# EAGLE board moteus_n1 (EAGLE 9.6.0), part 1 of 2
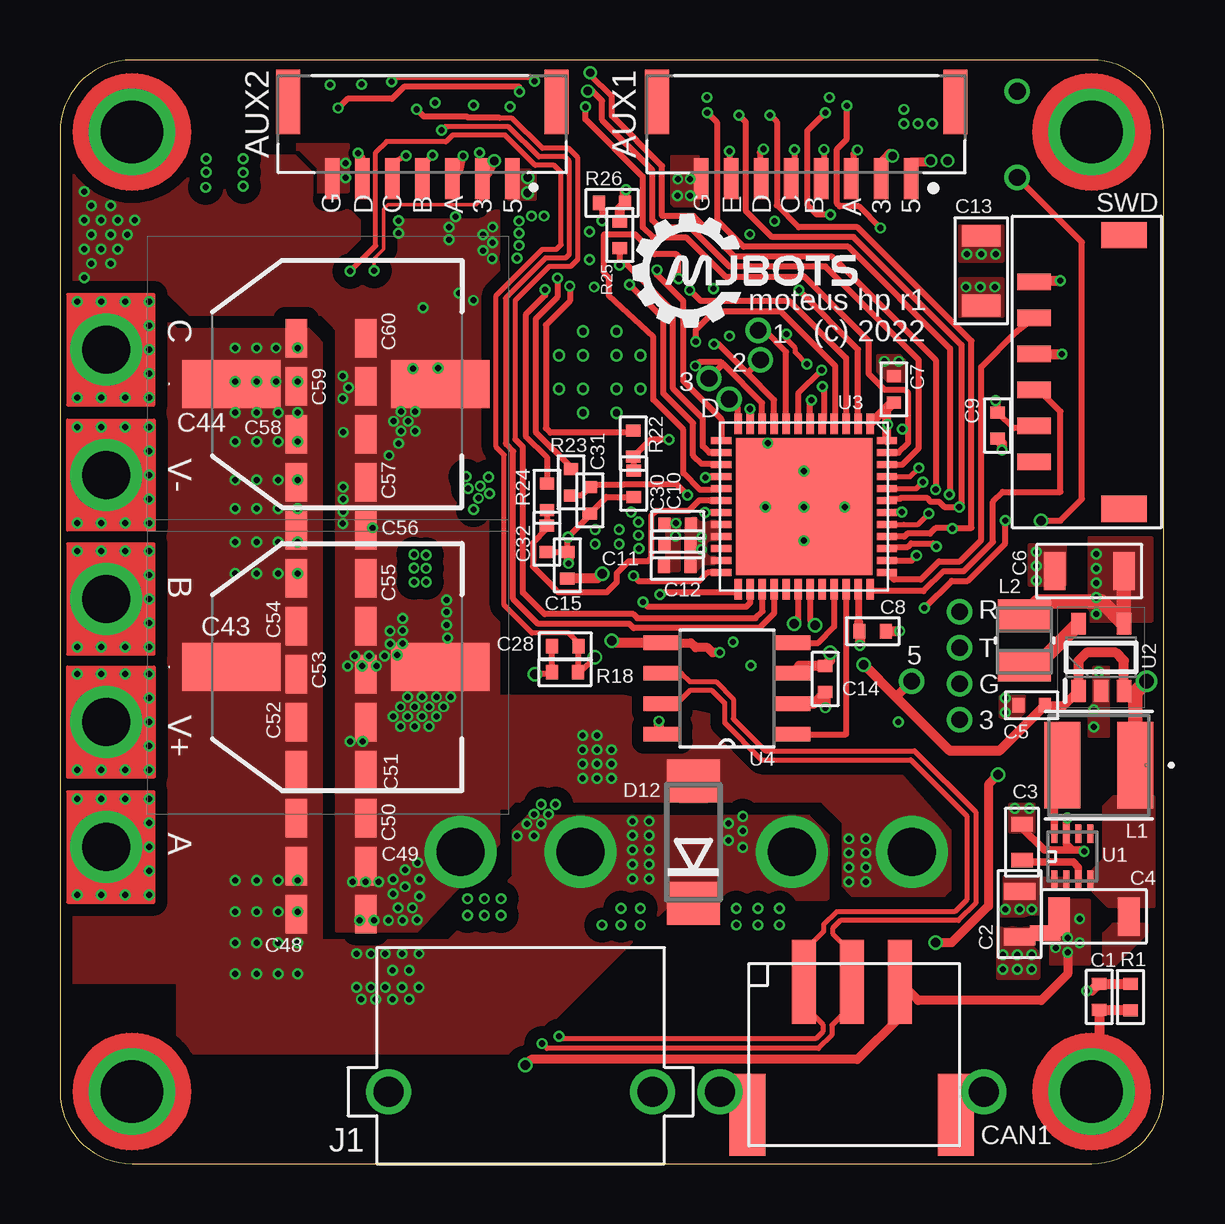
[diagram p0: board, top side]
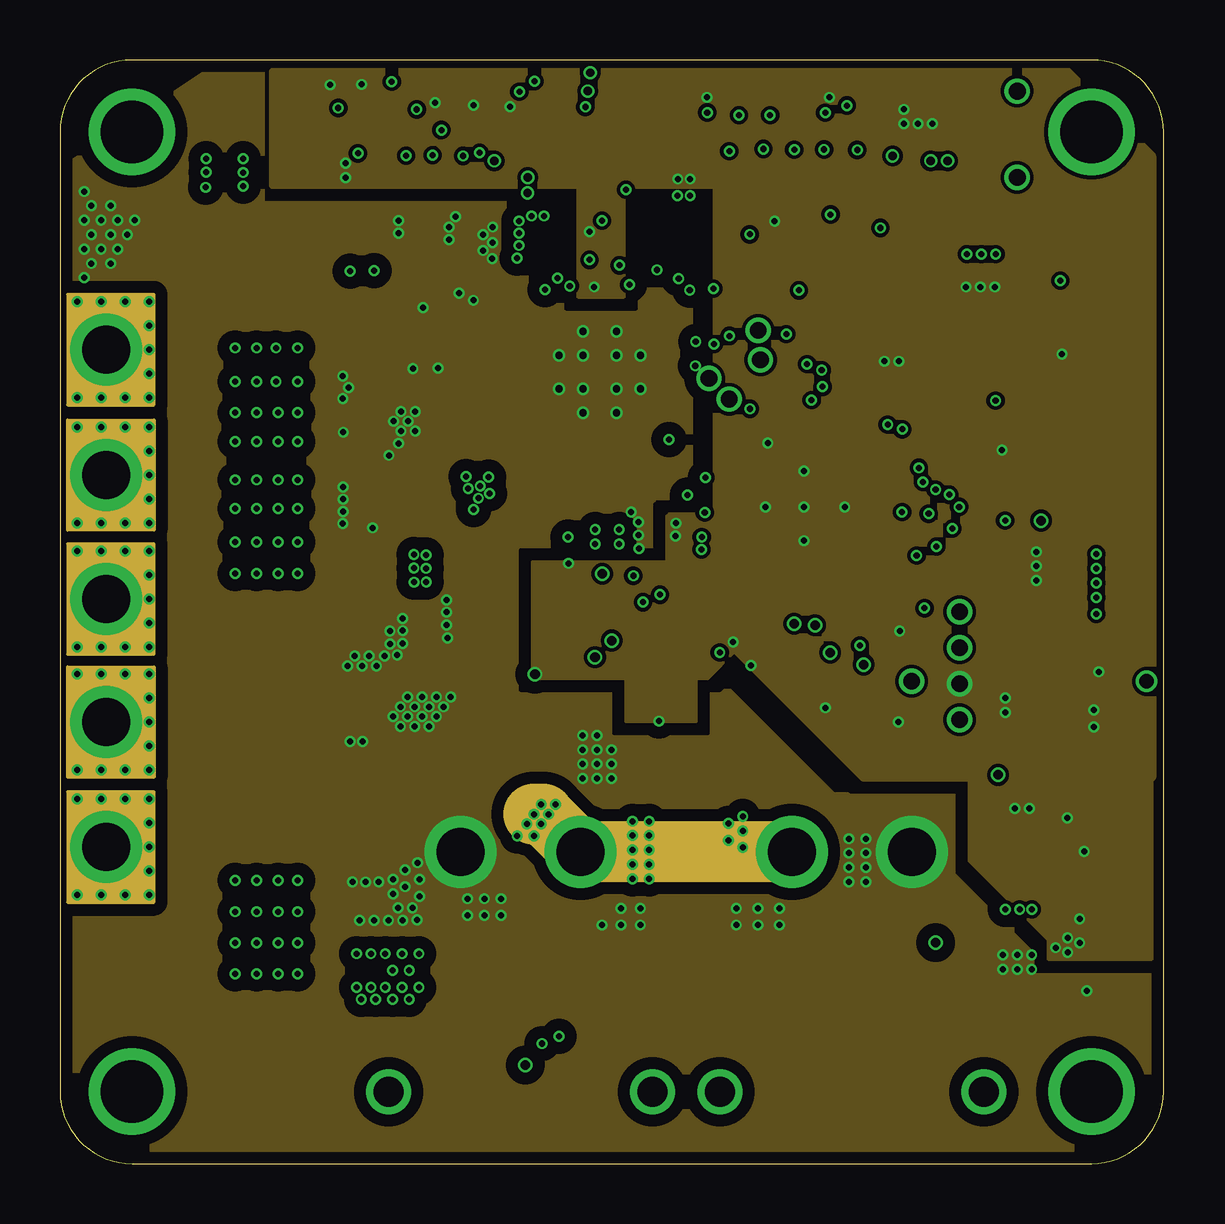
[diagram p1: board, inner layer Route2]
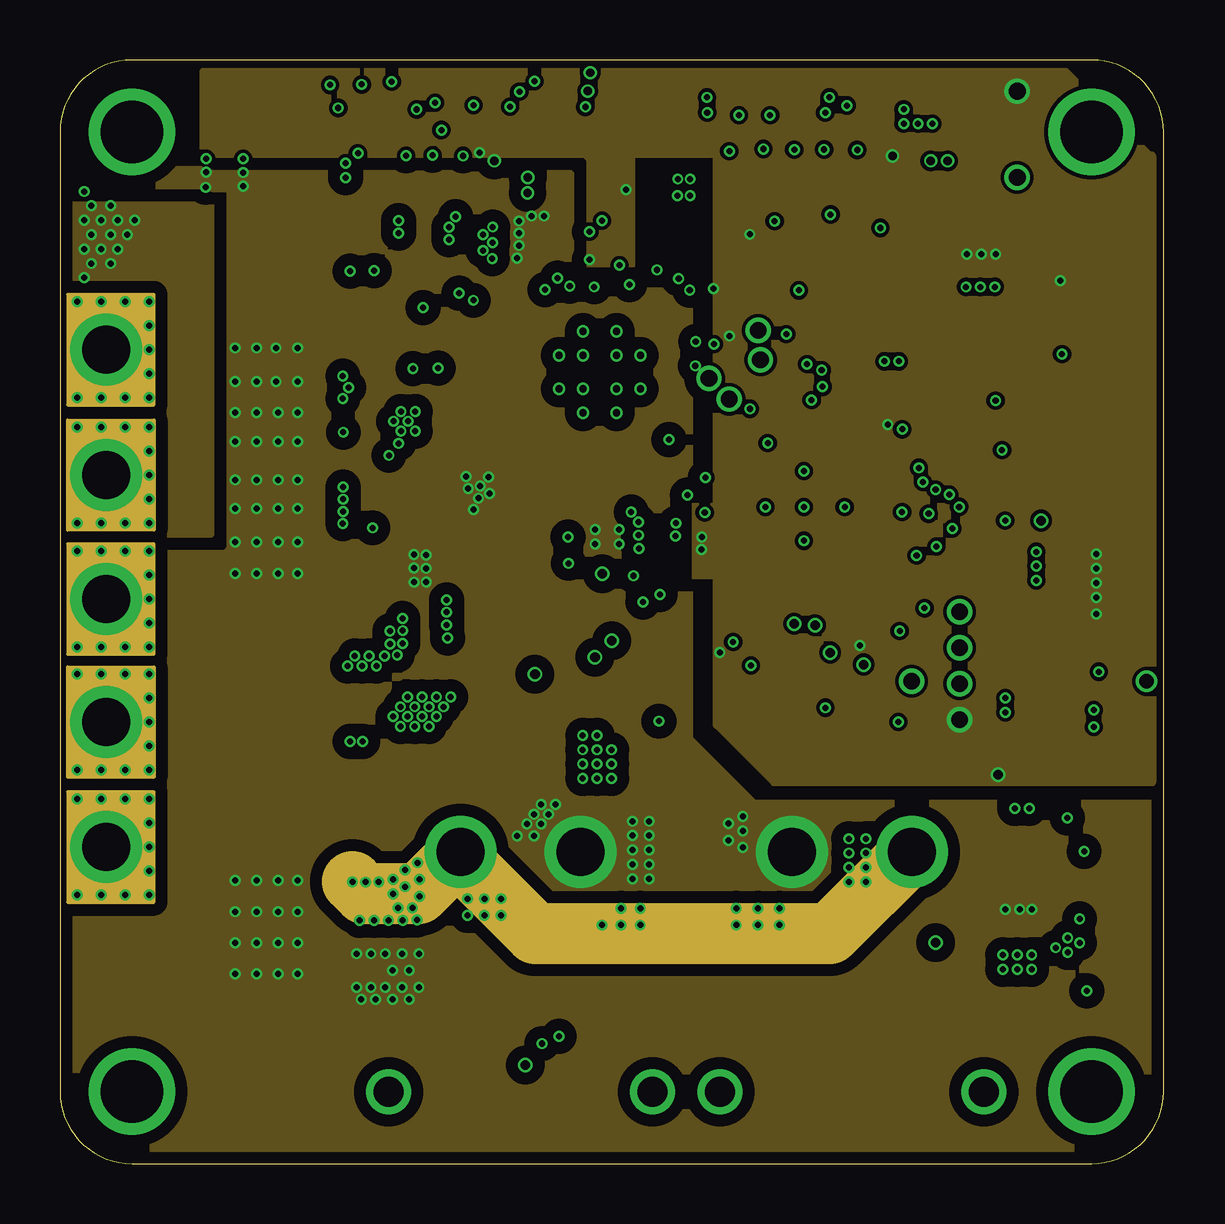
[diagram p2: board, inner layer Route15]
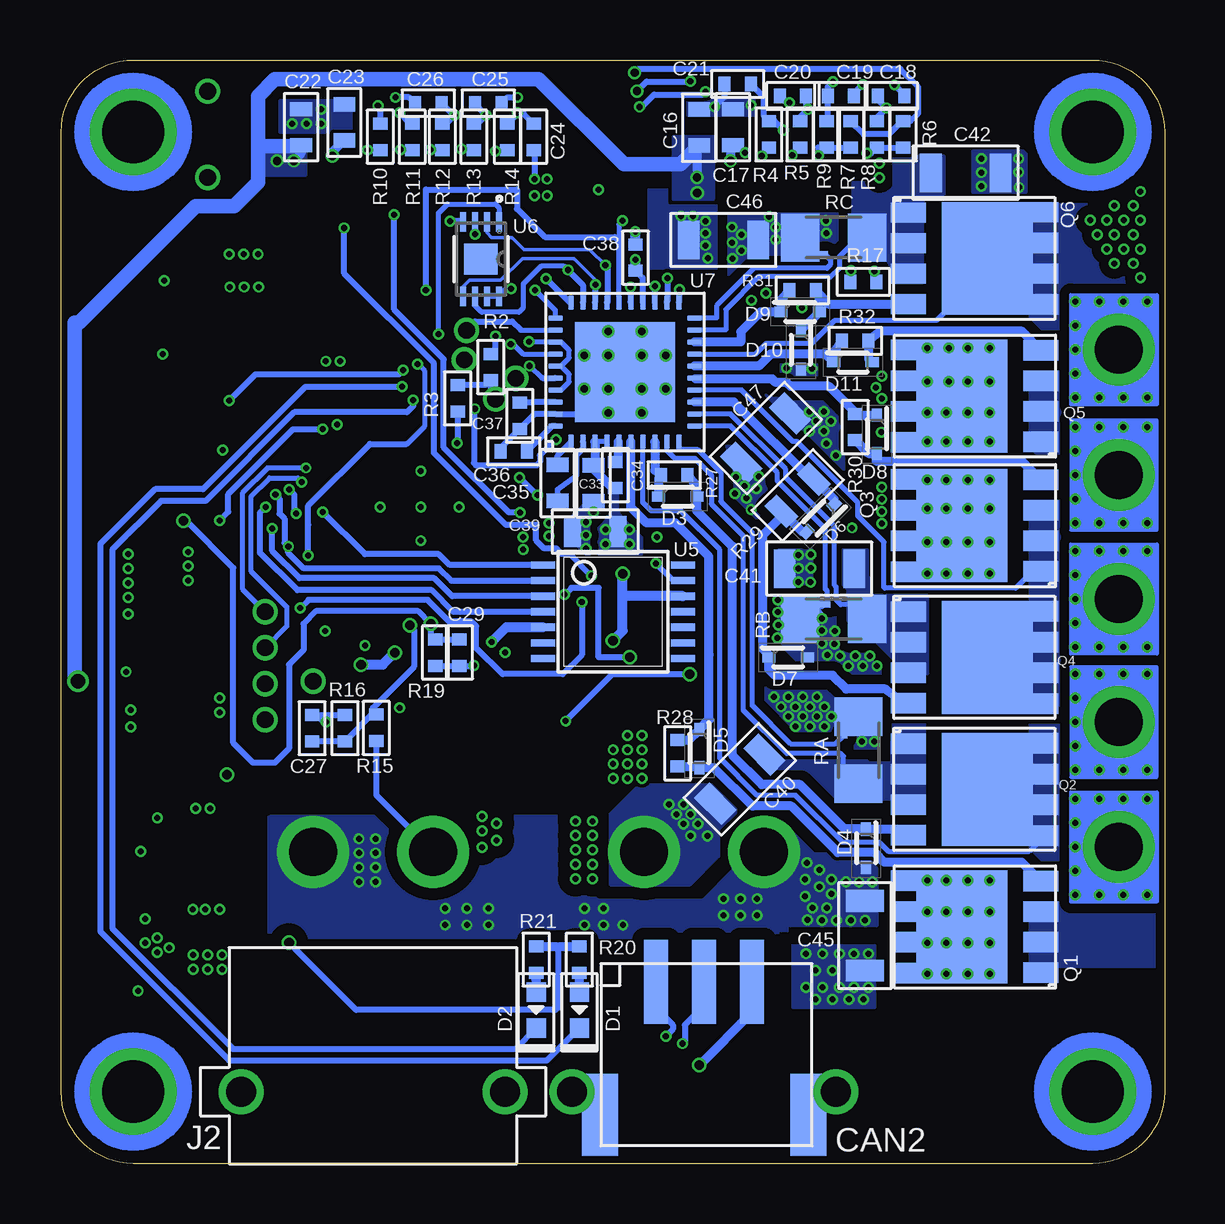
[diagram p3: board, bottom side, seen from below]

Size 46 x 46 mm. Coordinates in mm from the lower left corner, seen from the top.
Outline: 0,43 0,3 arc90 3,0 43,0 arc90 46,3 46,43 arc90 43,46 3,46 arc90 0,43
Copper layers (1*2*15*16): Top 0.035mm / dielectric 0.23mm / Route2 0.035mm / dielectric 0.93mm / Route15 0.035mm / dielectric 0.23mm / Bottom 0.035mm
Design rules "MF_4_mil_drill_4_Layer *": minimum track width 5mil, minimum drill 4mil, track to track 6mil, track to pad 6mil, pad to pad 6mil, via to via 6mil, smd to smd 0mil, copper to edge 10mil, drill to drill 10mil, minimum pad ring 4mil, minimum via ring 4mil, stop-mask expansion 2mil, vias tented up to drill 25mil, thermal gap 10mil
Net classes: 0 default: width 0.127 mm; 1 CAN: width 0.216 mm, clearance 0.127 mm; 2 HV: clearance 0.13 mm; 3 GATE: width 0.384 mm

## Footprints (pad centres in the part's own frame; a part is rotated, then mirrored left to right if it is on the bottom)
16AWG_TERM = drill 2: 1 0,0 | drill 0.254: 2 -2,1.8; 3 -2,0.8; 4 -2,-0.2; 5 -2,-1.2; 6 -1,1.8; 7 2,1.8; 8 1,1.8; 9 2,0.8; 10 2,-0.2; 11 2,-1.2; 12 0,1.8
JST_SM08B-GHS-TB(LF)(SN) = smd 0.6 x 1.7: 1 -4.375,0; 2 -3.125,0; 3 -1.875,0; 4 -0.625,0; 5 0.625,0; 6 1.875,0; 7 3.125,0; 8 4.375,0 | smd 1 x 2.7: SH1 -6.225,-3.2; SH2 6.225,-3.2
JST_SM07B-GHS-TB(LF)(SN) = smd 0.6 x 1.7: 1 -3.75,1.85; 2 -2.5,1.85; 3 -1.25,1.85; 4 0,1.85; 5 1.25,1.85; 6 2.5,1.85; 7 3.75,1.85 | smd 1 x 2.7: S1 5.6,-1.35; S2 -5.6,-1.35
C0402 = smd 0.5 x 0.6: P$1 -0.55,0; P$2 0.55,0
C0805 = smd 0.7 x 1.3: P$1 -0.95,0; P$2 0.95,0
C0603 = smd 0.6 x 0.9: P$1 -0.75,0; P$2 0.75,0
C1206 = smd 0.9 x 1.6: P$1 -1.45,0; P$2 1.45,0
EEHZS1V471UP = smd 4.1 x 2: 1 -4.35,0; 2 4.35,0
C1206_NOCREAM_NOBORDER = smd 0.9 x 1.6: P$1 -1.45,0; P$2 1.45,0
JST_S3B-PH-SM4-TB(LF)(SN) = smd 1 x 3.5: 1 2,-2.98; 2 0,-2.98; 3 -2,-2.98 | smd 1.5 x 3.4: S1 -4.35,2.57; S2 4.35,2.57
LED0603 = smd 0.8 x 0.8: ANODE 0.75,0; CATHODE -0.75,0
SODFL1608X70N = smd 0.55 x 0.42: 1 -0.8,0; 2 0.8,0
DO214AA = smd 1.8 x 2.2: A 2.55,0; C -2.55,0
24AWG_PAD = drill 0.7: P$1 0,0
XT30PW_MALE = drill 2: 1 -2.5,0; 2 2.5,0 | drill 1.25: M1 -5.5,10; M2 5.5,10
IND_BOURNS_SRN4018 = smd 1.499 x 3.607: 1 -1.524,0; 2 1.524,0
IND_4024100_WRE = smd 1.295 x 2.21: 1 -1.054,0; 2 1.054,0
M2.5MOUNT = drill 2.6: P$1 0,0
SOP_ADVANCE_8_VIAS = smd 0.85 x 1.45: 1 -1.905,-2.95; 2 -0.635,-2.95; 3 0.635,-2.95; 4 1.905,-2.95 | smd 0.85 x 1.1: 5 1.925,2.75; 6 0.637,2.75; 7 -0.637,2.75; 8 -1.925,2.75 | smd 4.7 x 3.8: PAD 0,0.35
SOP_ADVANCE_8 = smd 0.85 x 1.45: 1 -1.905,-2.95; 2 -0.635,-2.95; 3 0.635,-2.95; 4 1.905,-2.95 | smd 0.85 x 1.1: 5 1.925,2.75; 6 0.637,2.75; 7 -0.637,2.75; 8 -1.925,2.75 | smd 4.7 x 3.8: PAD 0,0.35
R0402 = smd 0.5 x 0.6: P$1 -0.55,0; P$2 0.55,0
R0805 = smd 0.7 x 1.3: P$1 -0.95,0; P$2 0.95,0
M1206 = smd 1.6 x 2: 1 -1.4,0; 2 1.4,0
SHORT_TOP-50 = smd 0.254 x 0.254: 1 0.127,0; 2 -0.127,0
SHORT_TOP-MEDIUM = smd 0.635 x 0.635: 1 0.318,0; 2 -0.318,0
JST_S6B-ZR-SM4A-TF(LF)(SN) = smd 0.7 x 1.4: 1 3.75,0; 2 2.25,0; 3 0.75,0; 4 -0.75,0; 5 -2.25,0; 6 -3.75,0 | smd 1.1 x 1.9: P1 5.7,3.75; P2 -5.7,3.75
21-0487A_MXM = smd 0.762 x 0.254: 1 -0.953,0.75; 2 -0.953,0.25; 3 -0.953,-0.25; 4 -0.953,-0.75; 5 0.953,-0.75; 6 0.953,-0.25; 7 0.953,0.25; 8 0.953,0.75
SOT95P280X130-5N = smd 0.9 x 0.6: 1 -1.4,0.95; 2 -1.4,0; 3 -1.4,-0.95; 4 1.4,-0.95; 5 1.4,0.95
QFN50P700X700X60-49N = smd 0.85 x 0.3: 1 -3.45,2.75; 2 -3.45,2.25; 3 -3.45,1.75; 4 -3.45,1.25; 5 -3.45,0.75; 6 -3.45,0.25; 7 -3.45,-0.25; 8 -3.45,-0.75; 9 -3.45,-1.25; 10 -3.45,-1.75; 11 -3.45,-2.25; 12 -3.45,-2.75; 25 3.45,-2.75; 26 3.45,-2.25; 27 3.45,-1.75; 28 3.45,-1.25; 29 3.45,-0.75; 30 3.45,-0.25; 31 3.45,0.25; 32 3.45,0.75; 33 3.45,1.25; 34 3.45,1.75; 35 3.45,2.25; 36 3.45,2.75 | smd 0.3 x 0.85: 13 -2.75,-3.45; 14 -2.25,-3.45; 15 -1.75,-3.45; 16 -1.25,-3.45; 17 -0.75,-3.45; 18 -0.25,-3.45; 19 0.25,-3.45; 20 0.75,-3.45; 21 1.25,-3.45; 22 1.75,-3.45; 23 2.25,-3.45; 24 2.75,-3.45; 37 2.75,3.45; 38 2.25,3.45; 39 1.75,3.45; 40 1.25,3.45; 41 0.75,3.45; 42 0.25,3.45; 43 -0.25,3.45; 44 -0.75,3.45; 45 -1.25,3.45; 46 -1.75,3.45; 47 -2.25,3.45; 48 -2.75,3.45 | smd 5.7 x 5.7: 49 0,0
SOIC8 = smd 1.549 x 0.61: 1 -2.7,1.905; 2 -2.7,0.635; 3 -2.7,-0.635; 4 -2.7,-1.905; 5 2.7,-1.905; 6 2.7,-0.635; 7 2.7,0.635; 8 2.7,1.905
TSSOP14 = smd 0.305 x 0.991: 1 -1.95,-2.918; 2 -1.3,-2.918; 3 -0.65,-2.918; 4 0,-2.918; 5 0.65,-2.918; 6 1.3,-2.918; 7 1.95,-2.918; 8 1.95,2.918; 9 1.3,2.918; 10 0.65,2.918; 11 0,2.918; 12 -0.65,2.918; 13 -1.3,2.918; 14 -1.95,2.918
UDFN8_2X3_ONS-M = smd 0.813 x 0.254: 1 -1.549,0.75; 2 -1.549,0.25; 3 -1.549,-0.25; 4 -1.549,-0.75; 5 1.549,-0.75; 6 1.549,-0.25; 7 1.549,0.25; 8 1.549,0.75 | smd 1.295 x 1.397: 9 0,0
WQFN-40 = smd 0.22 x 0.6: 1 2.25,2.9; 2 1.75,2.9; 3 1.25,2.9; 4 0.75,2.9; 5 0.25,2.9; 6 -0.25,2.9; 7 -0.75,2.9; 8 -1.25,2.9; 9 -1.75,2.9; 10 -2.25,2.9; 21 -2.25,-2.9; 22 -1.75,-2.9; 23 -1.25,-2.9; 24 -0.75,-2.9; 25 -0.25,-2.9; 26 0.25,-2.9; 27 0.75,-2.9; 28 1.25,-2.9; 29 1.75,-2.9; 30 2.25,-2.9 | smd 0.6 x 0.22: 11 -2.9,2.25; 12 -2.9,1.75; 13 -2.9,1.25; 14 -2.9,0.75; 15 -2.9,0.25; 16 -2.9,-0.25; 17 -2.9,-0.75; 18 -2.9,-1.25; 19 -2.9,-1.75; 20 -2.9,-2.25; 31 2.9,-2.25; 32 2.9,-1.75; 33 2.9,-1.25; 34 2.9,-0.75; 35 2.9,-0.25; 36 2.9,0.25; 37 2.9,0.75; 38 2.9,1.25; 39 2.9,1.75; 40 2.9,2.25 | drill 0.305: P1 -0.7,-1.7; P2 0.7,-1.7; P3 1.7,-0.7; P7 0.7,-0.7; P8 0.7,1.7; P9 -0.7,1.7; P12 -0.7,-0.7; P13 0.7,0.7; P14 -0.7,0.7; P17 -1.7,-0.7; P18 1.7,0.7; P19 -1.7,0.7 | smd 4.15 x 4.15: PAD 0,0

## Placement (x,y rotation side)
A  PAD16AWG_TERM  [16AWG_TERM]  1.92,13.19 90 bottom
AUX1  SM08B-GHS-TB(LF)(SN)  [JST_SM08B-GHS-TB(LF)(SN)]  31.1,41.05 180 top
AUX2  SM07B-GHS-TB(LF)(SN)  [JST_SM07B-GHS-TB(LF)(SN)]  15.1,42.9 180 top
B  PAD16AWG_TERM  [16AWG_TERM]  1.92,23.53 90 bottom
C  PAD16AWG_TERM  [16AWG_TERM]  1.92,33.92 90 bottom
C1  DNP  [C0402]  43.32,6.95 90 top
C2  1uF 100V  [C0805]  40,10.4 270 top
C3  1uF  [C0603]  40.1,13.4 90 top
C4  10uF  [C1206]  43.1,10.3 180 top
C5  1uF  [C0402]  40.5,19.1 180 top
C6  22uF  [C1206]  42.9,24.7 180 top
C7  0.1uF  [C0402]  34.76,32.27 90 top
C8  0.1uF  [C0402]  33.88,22.19 0 top
C9  0.1uF  [C0402]  39.08,30.76 270 top
C10  1uF  [C0402]  25.75,26.62 180 top
C11  0.1uF  [C0402]  25.74,25.82 180 top
C12  0.1uF  [C0402]  25.73,24.92 180 top
C13  10uF  [C1206]  38.4,37.21 90 top
C14  0.1uF  [C0402]  31.9,20.2 270 top
C15  0.1uF  [C0402]  21.15,24.94 90 top
C16  1uF  [C0603]  19.41,43.18 90 bottom
C17  1uF  [C0603]  18,43.2 90 bottom
C18  DNP  [C0402]  11.4,44.5 0 bottom
C19  DNP  [C0402]  13.5,44.5 0 bottom
C20  DNP  [C0402]  15.5,44.5 180 bottom
C21  DNP  [C0402]  17.8,45 180 bottom
C22  1uF  [C0603]  36,43.2 90 bottom
C23  1uF  [C0603]  34.2,43.4 90 bottom
C24  DNP  [C0402]  26.3,42.8 270 bottom
C25  DNP  [C0402]  28.2,44.2 0 bottom
C26  DNP  [C0402]  30.7,44.2 180 bottom
C27  0.01uF  [C0402]  35.54,18.15 90 bottom
C28  0.1uF  [C0402]  21.06,21.56 180 top
C29  0.1uF  [C0402]  29.4,21.3 270 bottom
C30  1000pF  [C0402]  23.91,28.34 270 top
C31  1000pF  [C0402]  22.09,27.65 270 top
C32  1000pF  [C0402]  20.29,26.04 270 top
C33  0.1uF 100V  [C0603]  23.81,28.35 270 bottom
C34  1uF  [C0402]  22.9,28.7 90 bottom
C35  0.1uF 100V  [C0603]  25.31,28.37 90 bottom
C36  1uF  [C0402]  27.13,29.69 0 bottom
C37  1uF  [C0402]  26.89,31.17 90 bottom
C38  0.1uF  [C0402]  22.06,37.76 270 bottom
C39  0.47uF 100V  [C0805]  23.74,26.34 180 bottom
C40  0.1uF 100V  [C1206]  17.71,16.02 45 bottom
C41  0.1uF 100V  [C1206]  14.4,24.8 0 bottom
C42  0.1uF 100V  [C1206]  8.3,41.3 180 bottom
C43  100uF 63V  [EEHZS1V471UP]  11.5,20.7 0 top
C44  100uF 63V  [EEHZS1V471UP]  11.5,32.5 0 top
C45  4.7uF 100V  [C1206]  12.5,9.5 90 bottom
C46  4.7uF 100V  [C1206]  18.4,38.5 0 bottom
C47  4.7uF 100V  [C1206]  16.63,30.24 45 bottom
C48  4.7uF 100V  [C1206_NOCREAM_NOBORDER]  11.3,10.4 0 top
C49  4.7uF 100V  [C1206_NOCREAM_NOBORDER]  11.3,12.4 0 top
C50  4.7uF 100V  [C1206_NOCREAM_NOBORDER]  11.3,14.4 0 top
C51  4.7uF 100V  [C1206_NOCREAM_NOBORDER]  11.3,16.4 0 top
C52  4.7uF 100V  [C1206_NOCREAM_NOBORDER]  11.3,18.4 0 top
C53  4.7uF 100V  [C1206_NOCREAM_NOBORDER]  11.3,20.4 0 top
C54  4.7uF 100V  [C1206_NOCREAM_NOBORDER]  11.3,22.4 0 top
C55  4.7uF 100V  [C1206_NOCREAM_NOBORDER]  11.3,24.4 0 top
C56  4.7uF 100V  [C1206_NOCREAM_NOBORDER]  11.3,26.4 0 top
C57  4.7uF 100V  [C1206_NOCREAM_NOBORDER]  11.3,28.4 0 top
C58  4.7uF 100V  [C1206_NOCREAM_NOBORDER]  11.3,30.4 0 top
C59  4.7uF 100V  [C1206_NOCREAM_NOBORDER]  11.3,32.4 0 top
C60  4.7uF 100V  [C1206_NOCREAM_NOBORDER]  11.3,34.4 0 top
CAN1  JST-PH3  [JST_S3B-PH-SM4-TB(LF)(SN)]  33,4.6 180 top
CAN2  JST-PH3  [JST_S3B-PH-SM4-TB(LF)(SN)]  19.2,4.6 180 bottom
D1  MF-LED-0603-RED  [LED0603]  24.4,6.4 90 bottom
D2  MF-LED-0603-RED  [LED0603]  26.2,6.4 90 bottom
D3  BAT41KFILM  [SODFL1608X70N]  20.3,27.8 0 bottom
D4  BAT41KFILM  [SODFL1608X70N]  12.45,13.14 270 bottom
D5  BAT41KFILM  [SODFL1608X70N]  19.4,17.3 270 bottom
D6  BAT41KFILM  [SODFL1608X70N]  14.35,26.9 225 bottom
D7  BAT41KFILM  [SODFL1608X70N]  15.7,21.1 0 bottom
D8  BAT41KFILM  [SODFL1608X70N]  12,30.4 270 bottom
D9  BAT41KFILM  [SODFL1608X70N]  15.2,35.5 0 bottom
D10  BAT41KFILM  [SODFL1608X70N]  15.17,33.92 270 bottom
D11  BAT41KFILM  [SODFL1608X70N]  13,33.4 0 bottom
D12  [DO214AA]  26.4,13.4 90 top
D33  PAD24AWG_PAD  [24AWG_PAD]  37.5,18.5 0 top
D50  PAD24AWG_PAD  [24AWG_PAD]  35.5,20.1 0 top
DAC  PAD24AWG_PAD  [24AWG_PAD]  27.9,31.86 0 top
DG1  PAD24AWG_PAD  [24AWG_PAD]  37.5,20 0 top
DTR  PAD24AWG_PAD  [24AWG_PAD]  37.5,23 0 top
DTX  PAD24AWG_PAD  [24AWG_PAD]  37.5,21.5 0 top
J1  XT30XT30PW_MALE  [XT30PW_MALE]  19.2,13 180 top
J2  XT30XT30PW_MALE  [XT30PW_MALE]  33,13 180 bottom
L1  SRN4018-220M  [IND_BOURNS_SRN4018]  43.3,16.6 180 top
L2  74404024100  [IND_4024100_WRE]  40.2,21.8 270 top
M1  MOUNT  [M2.5MOUNT]  3,3 0 top
M2  MOUNT  [M2.5MOUNT]  3,43 0 top
M3  MOUNT  [M2.5MOUNT]  43,3 0 top
M4  MOUNT  [M2.5MOUNT]  43,43 0 top
MOT1  PAD24AWG_PAD  [24AWG_PAD]  29.1,34.73 0 top
MOT2  PAD24AWG_PAD  [24AWG_PAD]  29.2,33.5 0 top
MOT3  PAD24AWG_PAD  [24AWG_PAD]  27.05,32.73 0 top
Q1  TPH1R204PL_VIAS  [SOP_ADVANCE_8_VIAS]  8.11,9.86 90 bottom
Q2  TPH1R204PLSOP_ADVANCE_8  [SOP_ADVANCE_8]  7.74,15.6 270 bottom
Q3  TPH1R204PL_VIAS  [SOP_ADVANCE_8_VIAS]  8.11,26.59 90 bottom
Q4  TPH1R204PLSOP_ADVANCE_8  [SOP_ADVANCE_8]  7.74,21.1 270 bottom
Q5  TPH1R204PL_VIAS  [SOP_ADVANCE_8_VIAS]  8.11,31.99 90 bottom
Q6  TPH1R204PLSOP_ADVANCE_8  [SOP_ADVANCE_8]  7.74,37.73 270 bottom
R1  DNP  [R0402]  44.62,6.94 90 top
R2  DNP  [R0402]  28.1,33.2 90 bottom
R3  100k 1%  [R0402]  29.47,31.9 90 bottom
R4  100  [R0402]  16.5,42.9 90 bottom
R5  100  [R0402]  15.2,42.9 90 bottom
R6  2k  [R0402]  10.9,42.9 270 bottom
R7  2k  [R0402]  13.1,42.9 270 bottom
R8  100  [R0402]  12,42.9 90 bottom
R9  100  [R0402]  14.1,42.9 90 bottom
R10  100  [R0402]  32.7,42.8 90 bottom
R11  100  [R0402]  31.37,42.8 90 bottom
R12  100  [R0402]  30.11,42.8 90 bottom
R13  100  [R0402]  28.8,42.8 90 bottom
R14  100  [R0402]  27.4,42.8 90 bottom
R15  100k 1%  [R0402]  32.87,18.16 270 bottom
R16  4.7k 1%  [R0402]  34.17,18.15 270 bottom
R17  47k NTC  [R0402]  12.56,36.75 0 bottom
R18  10k 1%  [R0402]  21.05,20.48 180 top
R19  10k 1%  [R0402]  30.4,21.3 270 bottom
R20  560  [R0402]  24.4,8.5 270 bottom
R21  560  [R0402]  26.2,8.5 270 bottom
R22  22  [R0402]  23.9,30.01 270 top
R23  22  [R0402]  21.3,28.4 270 top
R24  22  [R0402]  20.3,27.79 270 top
R25  2k  [R0402]  23.34,38.71 270 top
R26  2k  [R0402]  23.01,40.04 180 top
R27  7.5  [R0402]  20.45,28.7 0 bottom
R28  7.5  [R0402]  20.3,17.1 270 bottom
R29  7.5  [R0805]  15.3,27.86 225 bottom
R30  7.5  [R0402]  12.9,30.7 270 bottom
R31  7.5  [R0402]  15.1,36.4 0 bottom
R32  7.5  [R0402]  12.9,34.3 0 bottom
RA  0.5mOhm 1% 2W  [M1206]  12.76,17.23 270 bottom
RB  0.5mOhm 1% 2W  [M1206]  13.8,22.7 0 bottom
RC  0.5mOhm 1% 2W  [M1206]  13.8,38.6 0 bottom
SH1  SHORTT5  [SHORT_TOP-50]  13.36,17.98 270 bottom
SH2  SHORTT5  [SHORT_TOP-50]  14.2,23.3 0 bottom
SH3  SHORTT5  [SHORT_TOP-50]  14.3,37.9 0 bottom
SH4  SHORTMEDIUM  [SHORT_TOP-MEDIUM]  41.06,9.6 180 top
SWD  JST-ZH6  [JST_S6B-ZR-SM4A-TF(LF)(SN)]  40.6,33 270 top
TEMP1  PAD24AWG_PAD  [24AWG_PAD]  39.9,44.7 0 top
TEMP2  PAD24AWG_PAD  [24AWG_PAD]  39.9,41.1 0 top
U1  MAX15062AATA+T  [21-0487A_MXM]  42.2,12.8 90 top
U2  XC9265A331MR-G  [SOT95P280X130-5N]  43.4,21.1 90 top
U3  STM32G474CEU6  [QFN50P700X700X60-49N]  31.02,27.38 270 top
U4  TCAN1042HGV  [SOIC8]  27.8,19.8 180 top
U5  AS5147  [TSSOP14]  23,23 270 bottom
U6  CAT25080HU4I-GT3UDFN8_2X3_ONS-M  [UDFN8_2X3_ONS-M]  28.5,37.7 270 bottom
U7  DRV8353S  [WQFN-40]  22.5,32.99 180 bottom
VN  PAD16AWG_TERM  [16AWG_TERM]  1.92,28.7 270 top
VP  PAD16AWG_TERM  [16AWG_TERM]  1.92,18.4 270 top

## Library data of the parts
A B C VN VP = moteus_hp; POPULATE: 0
AUX1 = SM08B-GHS-TB_LF__SN_; DESCRIPTION: Connector Header Surface Mount, Right Angle 8 position 0.049 (1.25mm); DIGI-KEY_PART_NUMBER: 455-1570-2-ND; MF: JST Sales; MP: SM08B-GHS-TB(LF)(SN); MPN: SM08B-GHS-TB(LF)(SN); PACKAGE: None; POPULATE: 1; PURCHASE-URL: https://pricing.snapeda.com/search/part/SM08B-GHS-TB(LF)(SN)/?ref=eda
AUX2 = SM07B-GHS-TB_LF__SN_; DESCRIPTION: Connector Header Surface Mount, Right Angle 7 position 0.049 (1.25mm); DIGI-KEY_PART_NUMBER: 455-1569-2-ND; MF: JST Sales; MP: SM07B-GHS-TB(LF)(SN); MPN: SM07B-GHS-TB(LF)(SN); PACKAGE: None; POPULATE: 1; PURCHASE-URL: https://pricing.snapeda.com/search/part/SM07B-GHS-TB(LF)(SN)/?ref=eda
C1 C18-C21 C24-C26 R1 R2 = mfpassives; POPULATE: 0
C2 = mfpassives; MF: MURATA; MPN: GCM21BC72A105KE36L; POPULATE: 1
C3 C16 C17 C22 C23 = mfpassives; HOUSEPART: 1; MPN: MF-CAP-0603-1uF; POPULATE: 1
C4 C13 = mfpassives; HOUSEPART: 1; MPN: MF-CAP-1206-10uF; POPULATE: 1
C5 C10 C34 C36 C37 = mfpassives; HOUSEPART: 1; MPN: MF-CAP-0402-1uF; POPULATE: 1
C6 = mfpassives; MF: Samsung; MPN: CL31B226KPHNNNE; POPULATE: 1
C7-C9 C11 C12 C14 C15 C28 C29 C38 = mfpassives; HOUSEPART: 1; MPN: MF-CAP-0402-0.1uF; POPULATE: 1
C27 = mfpassives; HOUSEPART: 1; MPN: MF-CAP-0402-0.01uF; POPULATE: 1
C30-C32 = mfpassives; HOUSEPART: 1; MPN: MF-CAP-0402-1nF; POPULATE: 1
C33 C35 = mfpassives; MF: MURATA; MPN: GCJ188R72A104KA01D; POPULATE: 1
C39 = mfpassives; MF: KYOCERA; MPN: 08051C474KAT2A; POPULATE: 1
C40-C42 = mfpassives; MF: KYOCERA AVX; MPN: 12061C104KAT2A; POPULATE: 1
C43 C44 = EEH-ZU1J101P; HEIGHT: 12.8mm; MANUFACTURER_NAME: Panasonic; MANUFACTURER_PART_NUMBER: EEH-ZU1J101V; MF: Panasonic; MPN: EEH-ZU1J101V; POPULATE: 1
C45-C47 = mfpassives; MF: MURATA; MPN: GRJ31CC72A475KE01K; POPULATE: 1
C48-C60 = moteus_hp; MF: MURATA; MPN: GRJ31CC72A475KE01K; POPULATE: 0
CAN1 = controller; MF: JST; MPN: S3B-PH-SM4-TB(LF)(SN); POPULATE: 1
CAN2 = controller; MF: JST; MPN: S3B-PH-SM4-TB(LF)(SN); POPULATE: 0
D1 = mfleds; HOUSEPART: 1; MPN: MF-LED-0603-RED; POPULATE: 1; URL: https://factory.macrofab.com/part/MF-LED-0603-RED
D2 = mfleds; HOUSEPART: 1; MPN: MF-LED-0603-GREEN; POPULATE: 1; URL: https://factory.macrofab.com/part/MF-LED-0603-RED
D3-D11 = BAT41KFILM; DESCRIPTION: STMicroelectronics 100V 200mA, Diode, 2-Pin SOD-523 BAT41KFILM; HEIGHT: 0.7mm; MANUFACTURER_NAME: STMicroelectronics; MANUFACTURER_PART_NUMBER: BAT41KFILM; MF: ST; MOUSER_PART_NUMBER: 511-BAT41KFILM; MOUSER_PRICE-STOCK: https://www.mouser.co.uk/ProductDetail/STMicroelectronics/BAT41KFILM?qs=jZi1jxfVU94ZzsUNeiIqGg%3D%3D; MPN: BAT41KFILM; POPULATE: 1
D12 = diode; MF: LITTLEFUSE; MPN: TPSMB51A-VR; POPULATE: 1
D33 D50 DAC DG1 DTR DTX M1-M4 MOT1-MOT3 TEMP1 TEMP2 = controller; POPULATE: 0
J1 = controller; MPN: XT30PW-M; POPULATE: 1
J2 = controller; MPN: XT30PW-M; POPULATE: 0
L1 = controller; MANUFACTURER_PART_NUMBER: 74404042470; MF: Wurth Electronics; MPN: 74404042470; POPULATE: 1; VENDOR: Wurth
L2 = moteus_hp; COPYRIGHT: Copyright (C) 2022 Ultra Librarian. All rights reserved.; DIGI-KEY_PART_NUMBER_1: 732-5428-2-ND; DIGI-KEY_PART_NUMBER_2: 732-5428-1-ND; DIGI-KEY_PART_NUMBER_3: 732-5428-6-ND; MANUFACTURER_PART_NUMBER: 74404024100; MF: Wurth Electronics; MFR_NAME: Wurth Electronics; MPN: 74404024100; POPULATE: 1
Q1 Q3 Q5 = moteus_hp; MF: Toshiba; MPN: TPH2R408QM,L1Q; POPULATE: 1
Q2 Q4 Q6 = controller; MF: Toshiba; MPN: TPH2R408QM,L1Q; POPULATE: 1
R3 R15 = mfpassives; MF: Yageo; MPN: RC0402FR-07100KL; POPULATE: 1
R4 R5 R8-R14 = mfpassives; HOUSEPART: 1; MPN: MF-RES-0402-100; POPULATE: 1
R6 R7 R25 R26 = mfpassives; HOUSEPART: 1; MPN: MF-RES-0402-2K; POPULATE: 1
R16 = mfpassives; MF: Yageo; MPN: RC0402FR-074K7L; POPULATE: 1
R17 = mfpassives; MF: Murata; MPN: NCP15WB473F03RC; POPULATE: 1
R18 R19 = mfpassives; MF: Yageo; MPN: RC0402FR-0710KL; POPULATE: 1
R20 R21 = mfpassives; HOUSEPART: 1; MPN: MF-RES-0402-560; POPULATE: 1
R22-R24 = mfpassives; HOUSEPART: 1; MPN: MF-RES-0402-22; POPULATE: 1
R27 R28 R30-R32 = mfpassives; HOUSEPART: 1; MPN: RC0402FR-077R5L; POPULATE: 1
R29 = mfpassives; MF: Yageo; MPN: RC0805FR-077R5L; POPULATE: 1
RA RB RC = rcl; MF: Stackpole Electronics; MPN: HCS1206FTL500; POPULATE: 1
SH1-SH3 = shorts; BOM: no; POPULATE: 0
SH4 = shorts; POPULATE: 0
SWD = controller; MF: JST; MPN: S6B-ZR-SM4A-TF(LF)(SN); POPULATE: 1
U1 = power_dist; BUILT_BY: EMA_Jessica; COPYRIGHT: Copyright (C) 2018 Accelerated Designs. All rights reserved; MANUFACTURER_PART_NUMBER: MAX15062BATA+T; MF: Maxim; MPN: MAX15062BATA+T; POPULATE: 1; REVISION: 1; SOURCELIBRARY: Maxim_DP_2018-06-12; VENDOR: Maxim Integrated Products
U2 = XC9265A331MR-G; DESCRIPTION: Switching Voltage Regulators Ultra Low Power PFM DCDC Converter; HEIGHT: 1.3mm; MANUFACTURER_NAME: Torex; MANUFACTURER_PART_NUMBER: XC9265A331MR-G; MF: Torex; MOUSER_PART_NUMBER: 865-XC9265A331MR-G; MOUSER_PRICE-STOCK: https://www.mouser.co.uk/ProductDetail/Torex-Semiconductor/XC9265A331MR-G?qs=AsjdqWjXhJ9U1u7bKcUHSA%3D%3D; MPN: XC9265A331MR-G; POPULATE: 1
U3 = controller; DESCRIPTION: STMICROELECTRONICS - STM32G474CEU6 - MCU, 32BIT, 170MHZ, UFQFPN-48; HEIGHT: 0.6mm; MANUFACTURER_NAME: STMicroelectronics; MANUFACTURER_PART_NUMBER: STM32G474CEU6; MOUSER_PART_NUMBER: 511-STM32G474CEU6; MOUSER_PRICE-STOCK: https://www.mouser.com/Search/Refine.aspx?Keyword=511-STM32G474CEU6; MPN: STM32G474CEU6; POPULATE: 1
U4 = moteus_hp; MF: TI; MPN: TCAN1057AEVDRQ1‎; POPULATE: 1
U5 = controller; MF: AMS; MPN: AS5047P-ATSM; POPULATE: 1
U6 = moteus_hp; COPYRIGHT: Copyright (C) 2022 Ultra Librarian. All rights reserved.; DIGI-KEY_PART_NUMBER_1: 2156-CAT25080HU4I-GT3-OS-ND; DIGI-KEY_PART_NUMBER_2: CAT25080HU4I-GT3-ND; DIGI-KEY_PART_NUMBER_3: CAT25080HU4I-GT3OSCT-ND; DIGI-KEY_PART_NUMBER_4: CAT25080HU4I-GT3OSDKR-ND; DIGI-KEY_PART_NUMBER_5: CAT25080HU4I-GT3OSTR-ND; MANUFACTURER_PART_NUMBER: CAT25080HU4I-GT3; MF: onsemi; MFR_NAME: onsemi; MPN: CAT24C32HU4I-GT3; POPULATE: 1
U7 = controller; MF: TI; MPN: DRV8353FSRTAR; POPULATE: 1

## Nets
+3V3: AUX1.2 AUX2.2 C6.P$1 C7.P$1 C8.P$1 C10.P$1 C11.P$1 C12.P$1 C13.P$2 C15.P$1 C17.P$1 C23.P$1 C38.P$2 D33.P$1 L2.1 R2.P$2 R17.P$1 R20.P$1 R21.P$1 R25.P$1 R26.P$1 SWD.6 TEMP1.P$1 U2.4 U3.1 U3.20 U3.21 U3.23 U3.35 U3.48 U4.5 U5.12 U6.3 U6.7 U6.8 U7.24
+5V: AUX1.1 AUX2.1 C4.P$1 C5.P$1 C14.P$1 C16.P$1 C22.P$1 D50.P$1 L1.1 U1.4 U2.1 U2.3 U4.3
AS5047_CS: U3.42 U5.1
AS5047_MISO: C26.P$1 R12.P$2 U3.40 U5.3
AS5047_MOSI: C25.P$1 R13.P$2 U3.43 U5.4
AS5047_SCK: C24.P$1 R14.P$2 U3.39 U5.2
AUX_SC1: C20.P$1 R5.P$2 U3.27
AUX_SC2: C21.P$1 R4.P$2 U3.28
AUX_SCL: C19.P$1 R9.P$2 U3.46
AUX_SDA: C18.P$1 R8.P$2 U3.26 U3.47
CAN_N [CAN]: CAN1.2 CAN2.2 U4.6
CAN_P [CAN]: CAN1.1 CAN2.1 U4.7
CAN_RX: U3.33 U4.4
CAN_TX: U3.34 U4.1
CUR1: R22.P$1 U7.23
CUR2: R23.P$1 U7.22
CUR3: R24.P$1 U7.21
DAC: DAC.P$1 R2.P$1 R3.P$2 U3.12
DEBUG_RX: DTR.P$1 U3.45
DEBUG_TX: DTX.P$1 U3.44
DRV8323_CS: U3.17 U7.30
DRV8323_MISO: R25.P$2 U3.14 U6.2 U7.27
DRV8323_MOSI: U3.15 U6.5 U7.28
DRV8323_SCLK: U3.13 U6.6 U7.29
EEPROM_CS: U3.38 U6.1
FCUR1: C30.P$1 R22.P$2 U3.11
FCUR2: C31.P$1 R23.P$2 U3.16
FCUR3: C32.P$1 R24.P$2 U3.18
GHA [GATE]: D5.1 R28.P$1 U7.6
GHA_D [GATE]: D5.2 Q1.4 R28.P$2
GHB [GATE]: D8.1 R30.P$1 U7.15
GHB_D [GATE]: D8.2 Q3.4 R30.P$2
GHC [GATE]: D11.1 R32.P$1 U7.16
GHC_D [GATE]: D11.2 Q5.4 R32.P$2
GLA [GATE]: D3.1 R27.P$1 U7.8
GLA_D [GATE]: D3.2 D4.1 Q2.4 R27.P$2
GLB [GATE]: D6.1 R29.P$1 U7.13
GLB_D [GATE]: D6.2 D7.1 Q4.4 R29.P$2
GLC [GATE]: D9.1 R31.P$1 U7.18
GLC_D [GATE]: D9.2 D10.1 Q6.4 R31.P$2
GND: AUX1.8 AUX2.7 C3.P$2 C4.P$2 C5.P$2 C6.P$2 C7.P$2 C8.P$2 C9.P$2 C10.P$2 C11.P$2 C12.P$2 C13.P$1 C14.P$2 C15.P$2 C16.P$2 C17.P$2 C18.P$2 C19.P$2 C20.P$2 C21.P$2 C22.P$2 C23.P$2 C24.P$2 C25.P$2 C26.P$2 C27.P$2 C28.P$2 C29.P$2 C30.P$2 C31.P$2 C32.P$2 C38.P$1 CAN1.3 CAN2.3 DG1.P$1 R3.P$1 R16.P$1 R18.P$2 R19.P$2 SH4.2 SWD.4 U1.7 U2.2 U3.49 U4.2 U4.8 U5.5 U5.13 U6.4 U7.25
I2C_PULLUP: R6.P$1 R7.P$1 U3.41
LED1: D1.CATHODE U3.5
LED2: D2.CATHODE U3.6
MOTOR1: MOT1.P$1 U3.8 U7.32
MOTOR2: MOT2.P$1 U3.9 U7.34
MOTOR3: MOT3.P$1 U3.10 U7.36
MOTOR_ENABLE: U3.3 U7.31
MOTOR_FAULT: R26.P$2 U3.2 U7.26
MOTOR_HIZ: U3.4 U7.33 U7.35 U7.37
N$1: C1.P$1 M3.P$1 R1.P$1
N$2: C36.P$2 U7.40
N$3: AUX2.3 R4.P$1
N$4: C3.P$1 U1.3
N$5: L2.2 U2.5
N$6: AUX2.4 R5.P$1
N$7: AUX2.6 R6.P$2 R8.P$1
N$8: AUX2.5 R7.P$2 R9.P$1
N$9: AUX1.3 R10.P$1
N$10: C35.P$2 U7.1
N$11: AUX1.4 R11.P$1
N$12: AUX1.5 R12.P$1
N$13: C35.P$1 U7.2
N$14: C34.P$2 U7.5
N$15: AUX1.6 R13.P$1
N$16: C37.P$2 U7.38
N$17: D1.ANODE R20.P$2
N$18: D2.ANODE R21.P$2
N$19: AUX1.7 R14.P$1
NRST: C9.P$1 SWD.2 U3.7
PRIMARY_CS: R11.P$2 U3.19
PRIMARY_EXTRA: R10.P$2 U3.24
S1: AUX2.S1
S2: AUX2.S2
SHA [HV]: A.1 A.2 A.3 A.4 A.5 A.6 A.7 A.8 A.9 A.10 A.11 A.12 Q1.1 Q1.2 Q1.3 Q2.5 Q2.6 Q2.7 Q2.8 Q2.PAD U7.7
SHB [HV]: B.1 B.2 B.3 B.4 B.5 B.6 B.7 B.8 B.9 B.10 B.11 B.12 Q3.1 Q3.2 Q3.3 Q4.5 Q4.6 Q4.7 Q4.8 Q4.PAD U7.14
SHC [HV]: C.1 C.2 C.3 C.4 C.5 C.6 C.7 C.8 C.9 C.10 C.11 C.12 Q5.1 Q5.2 Q5.3 Q6.5 Q6.6 Q6.7 Q6.8 Q6.PAD U7.17
SWCLK: SWD.5 U3.37
SWDIO: SWD.3 U3.36
SXA_N: SH1.1 U7.10
SXA_P: C40.P$2 Q2.1 Q2.2 Q2.3 RA.2 U7.9
SXB_N: SH2.1 U7.11
SXB_P: C41.P$2 Q4.1 Q4.2 Q4.3 RB.2 U7.12
SXC_N: SH3.1 U7.20
SXC_P: C42.P$2 Q6.1 Q6.2 Q6.3 RC.2 U7.19
V+: C2.P$1 C33.P$1 C34.P$1 C39.P$1 C40.P$1 C41.P$1 C42.P$1 C43.1 C44.1 C45.P$1 C46.P$1 C47.P$1 C48.P$1 C49.P$1 C50.P$1 C51.P$1 C52.P$1 C53.P$1 C54.P$1 C55.P$1 C56.P$1 C57.P$1 C58.P$1 C59.P$1 C60.P$1 D12.C J1.1 J2.1 Q1.5 Q1.6 Q1.7 Q1.8 Q1.PAD Q3.5 Q3.6 Q3.7 Q3.8 Q3.PAD Q5.5 Q5.6 Q5.7 Q5.8 Q5.PAD R15.P$2 U1.1 U1.2 U7.3 U7.4 VP.1 VP.2 VP.3 VP.4 VP.5 VP.6 VP.7 VP.8 VP.9 VP.10 VP.11 VP.12
V-: C1.P$2 C2.P$2 C33.P$2 C36.P$1 C37.P$1 C39.P$2 C43.2 C44.2 C45.P$2 C46.P$2 C47.P$2 C48.P$2 C49.P$2 C50.P$2 C51.P$2 C52.P$2 C53.P$2 C54.P$2 C55.P$2 C56.P$2 C57.P$2 C58.P$2 C59.P$2 C60.P$2 D4.2 D7.2 D10.2 D12.A J1.2 J2.2 R1.P$2 RA.1 RB.1 RC.1 SH1.2 SH2.2 SH3.2 SH4.1 U7.39 U7.P1 U7.P2 U7.P3 U7.P7 U7.P8 U7.P9 U7.P12 U7.P13 U7.P14 U7.P17 U7.P18 U7.P19 U7.PAD VN.1 VN.2 VN.3 VN.4 VN.5 VN.6 VN.7 VN.8 VN.9 VN.10 VN.11 VN.12
VBAT_SENSE: C27.P$1 R15.P$1 R16.P$2 U3.31
VSW: L1.2 U1.8
VTEMP_FET: C28.P$1 R17.P$2 R18.P$1 U3.25
VTEMP_MOT: C29.P$1 R19.P$1 TEMP2.P$1 U3.30